# Altium PCB GT502W_MW260.PcbDoc
Units mil, origin at the board's own origin, x right, y up, seen from the top; angles counter-clockwise.
Board outline 2072.48 x 2691 mil, 2 copper layers (Top Layer, Bottom Layer), stack 10.556 mil thick; 114 components, 92 nets, 416 pads, 386 vias.
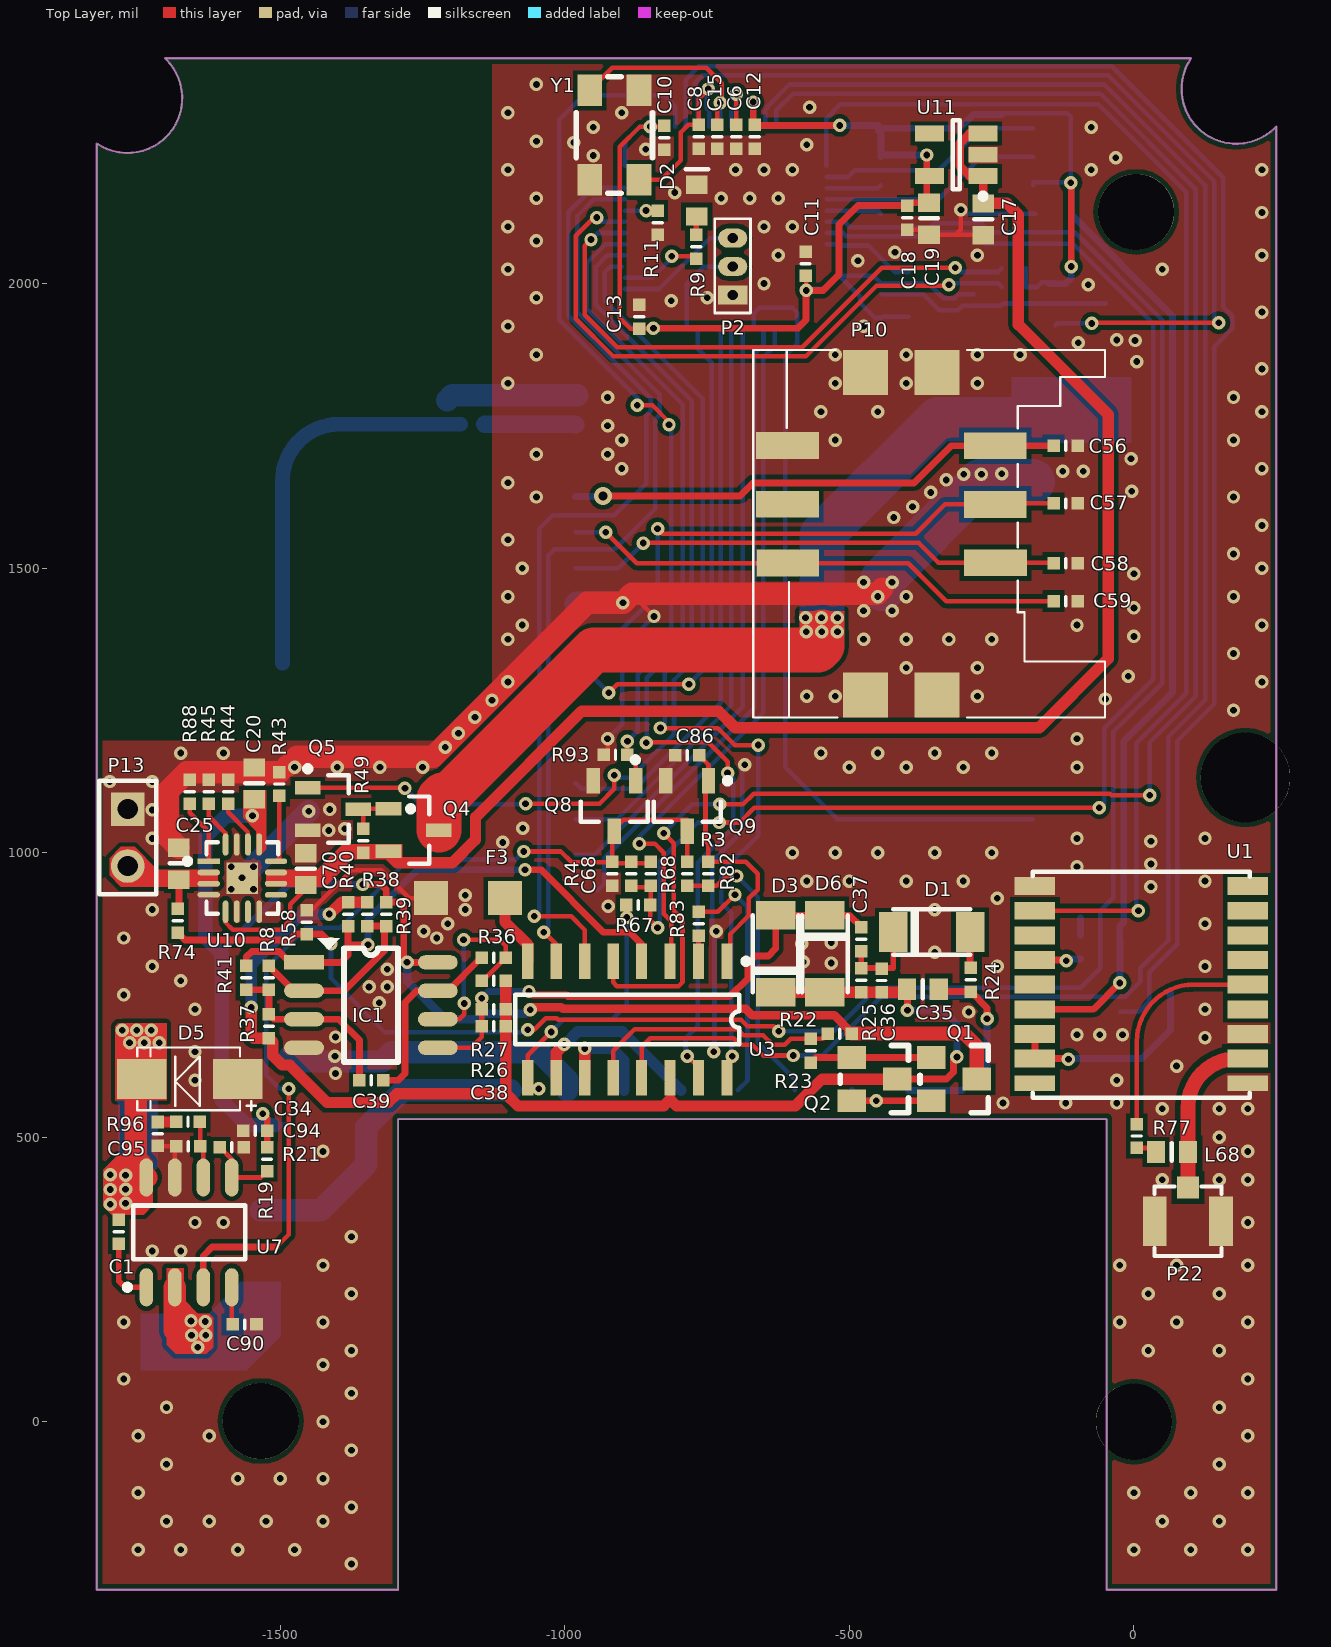
[diagram p0: Top Layer view]
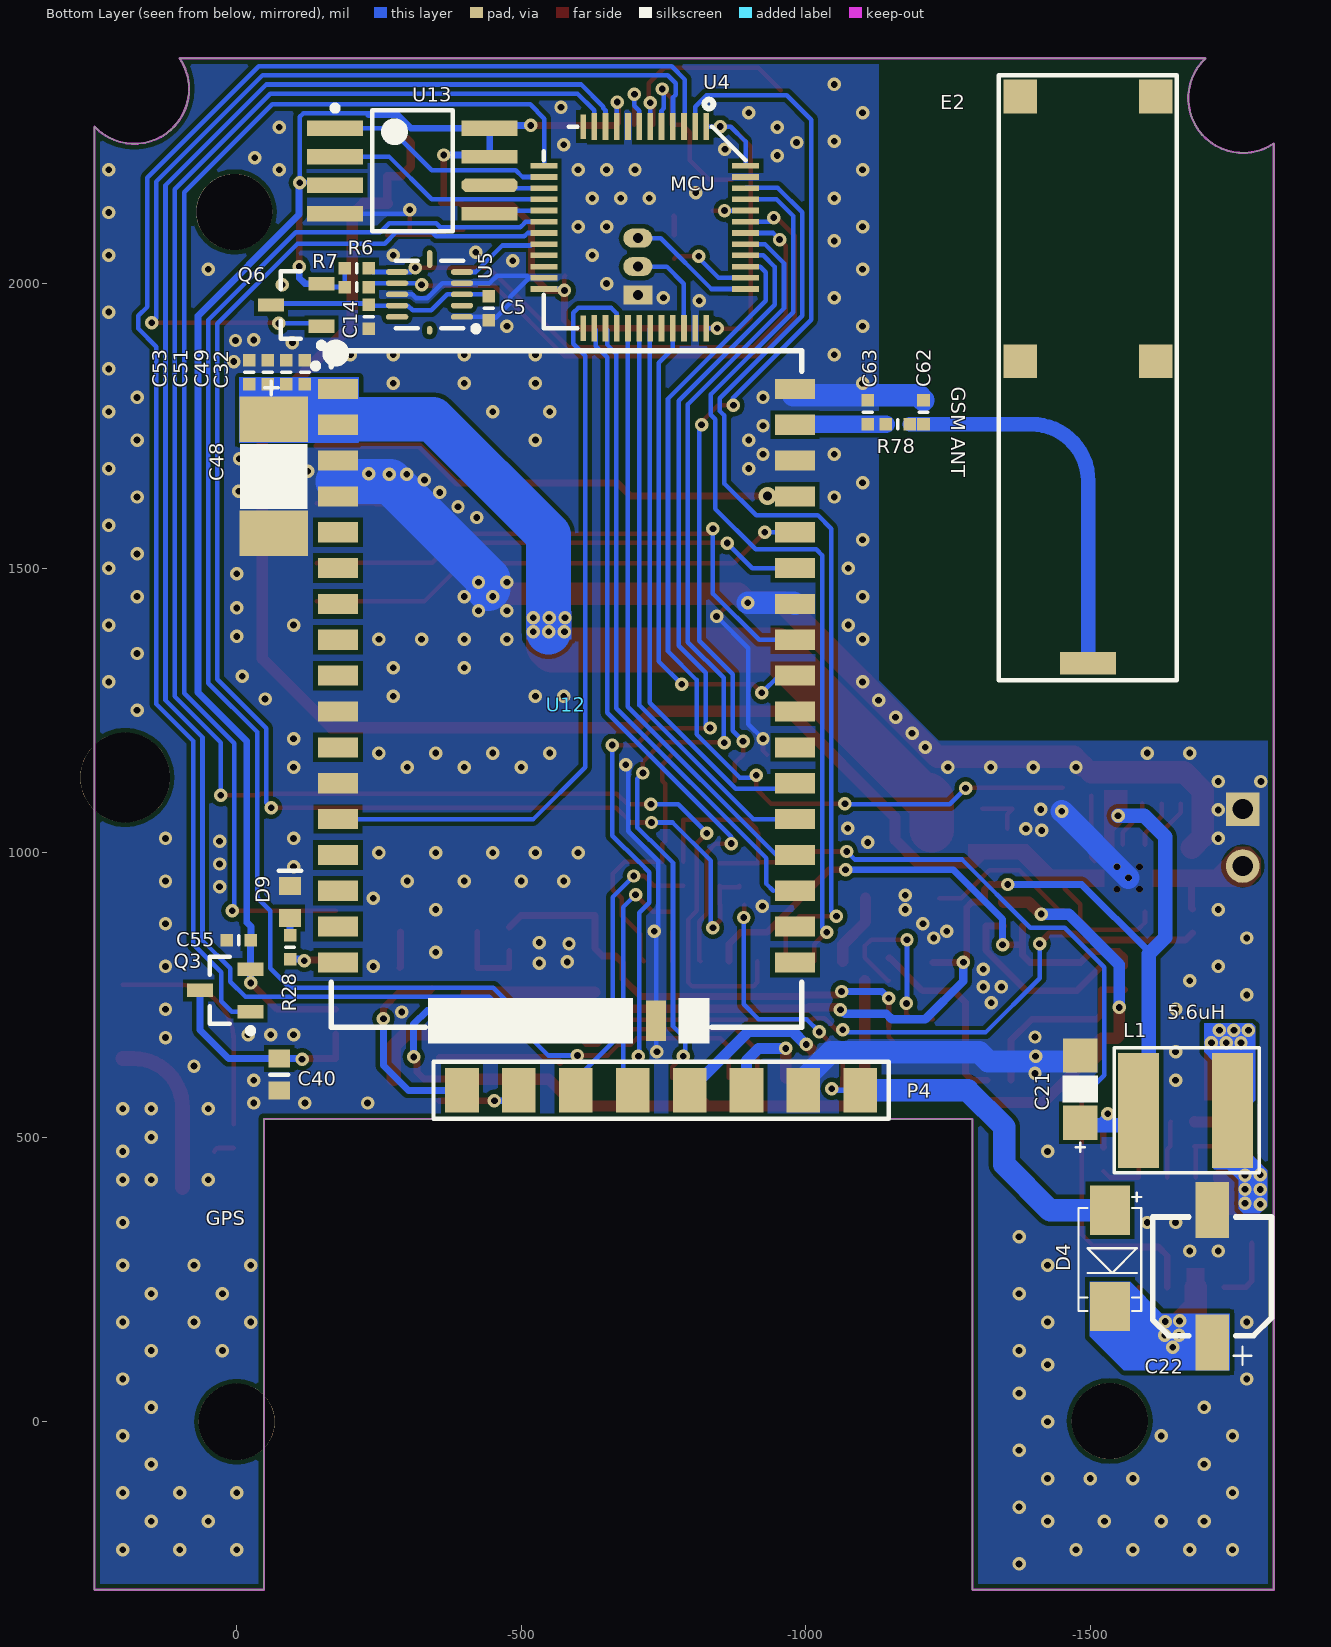
[diagram p1: Bottom Layer view, seen from below]
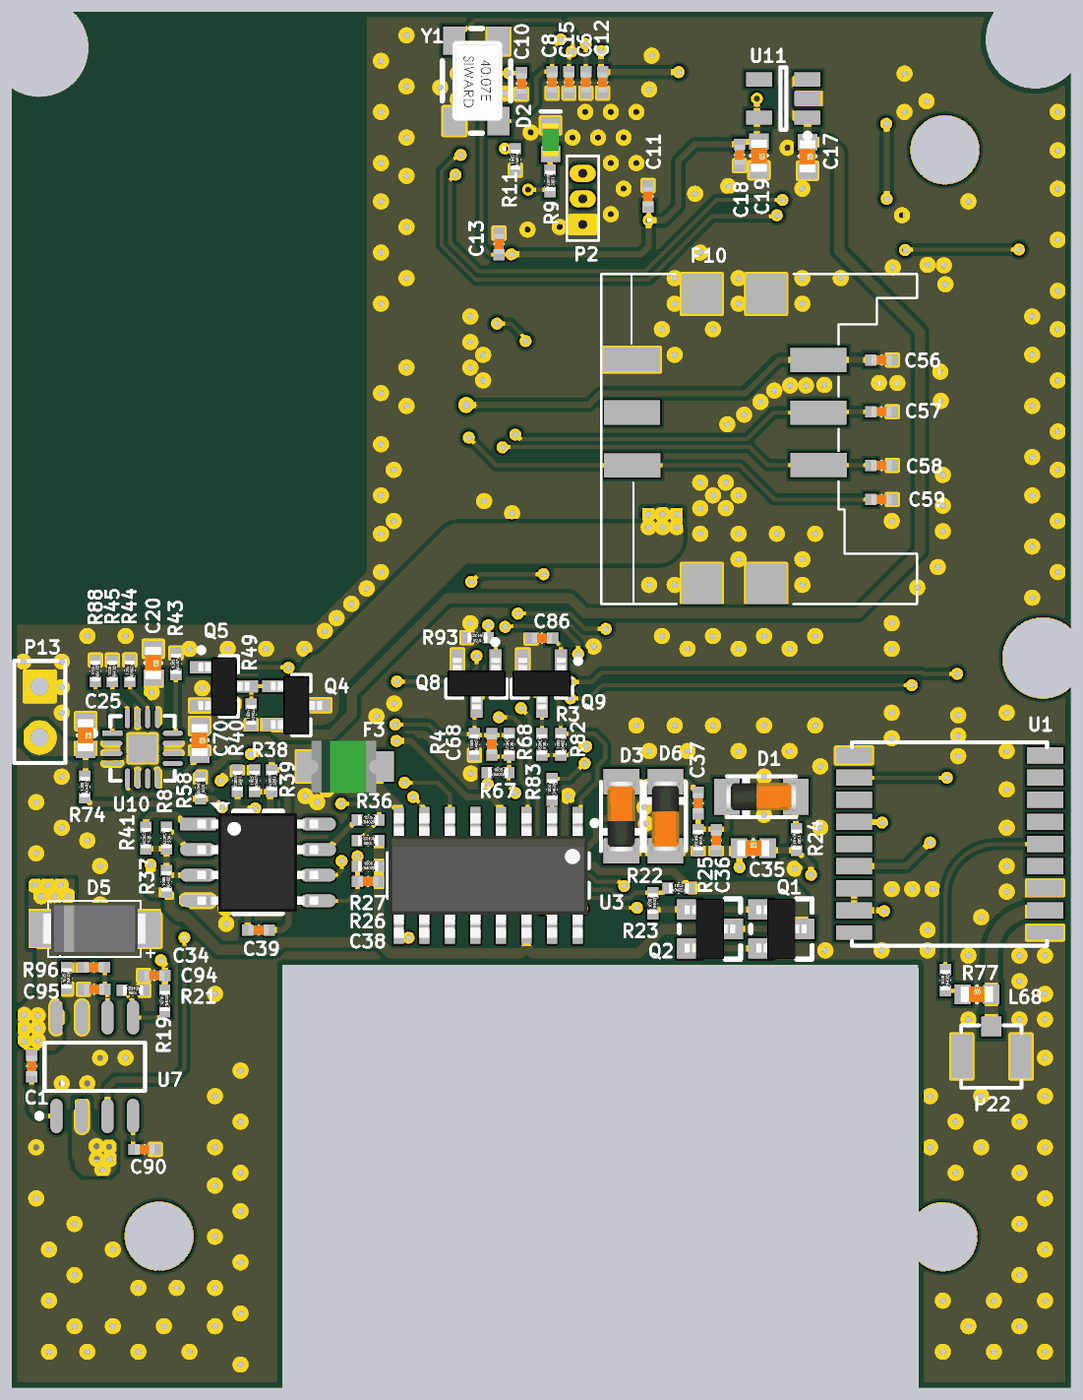
[diagram p2: 3D render of the assembled board from above, using the file's embedded part models]
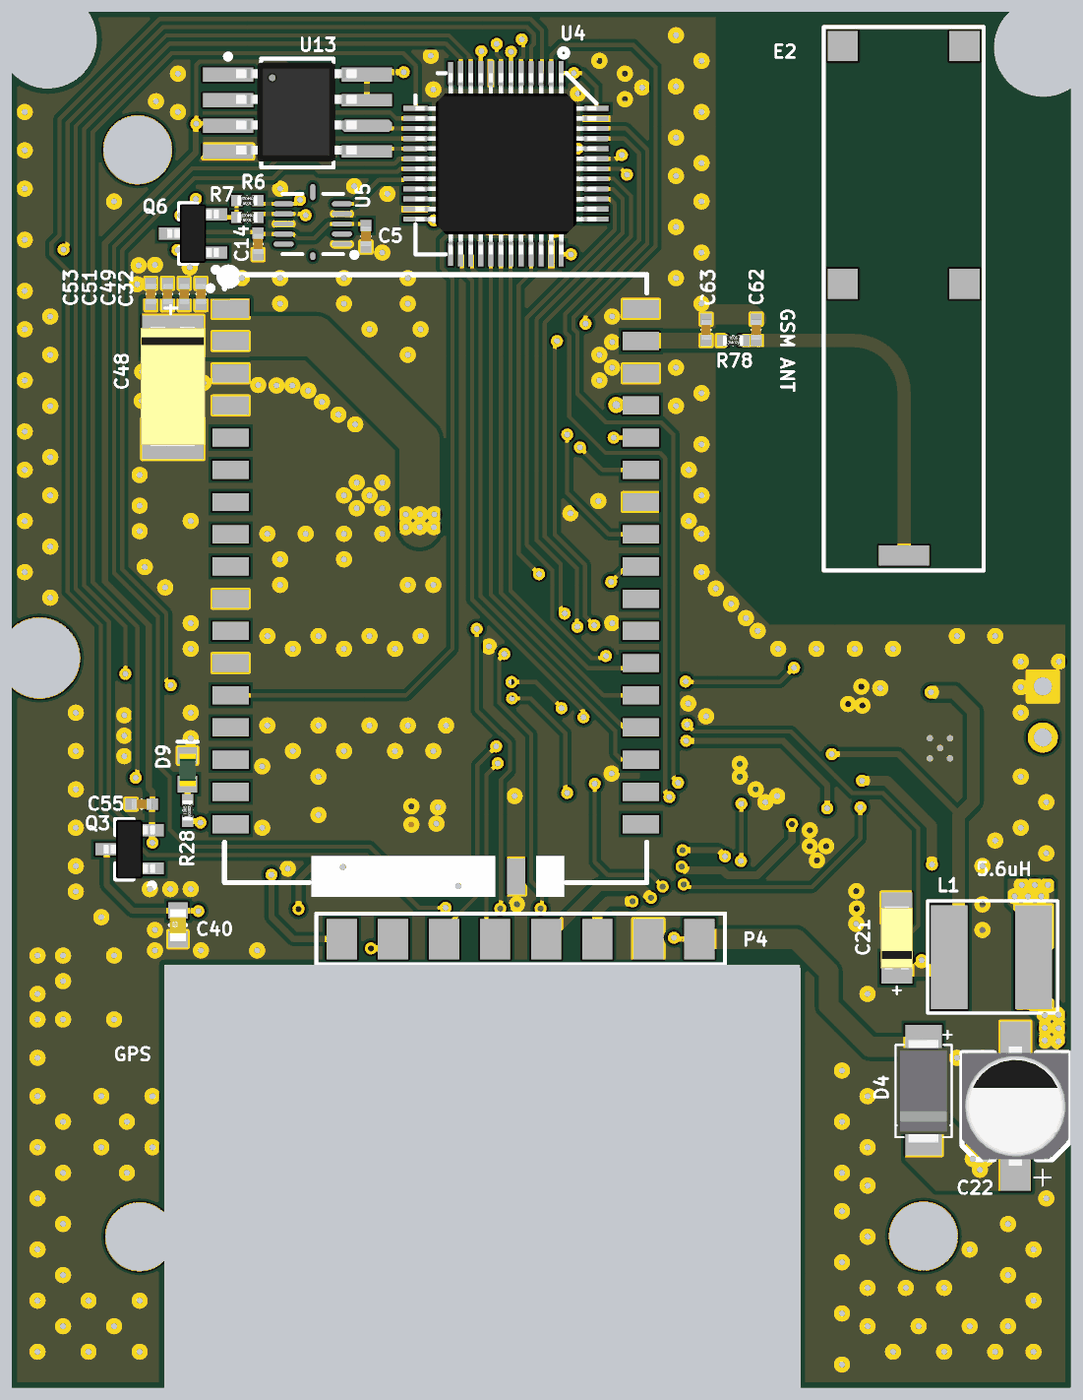
[diagram p3: 3D render of the assembled board from below, using the file's embedded part models]

## Layer stack, top to bottom
Top Layer: signal copper 1.378
Dielectric: core 7.8, FR-4, Dk 4.2
Bottom Layer: signal copper 1.378

## Board outline
-1822.48,-295.16 -1822.48,2246 -1822.4,2246 ccw(c-1768.63,2325.82) -1702.36,2395.62 -1702.36,2395.84 100.12,2395.84 100.12,2395.76 ccw(c179.94,2341.98) 249.74,2275.72 250,2275.48 250,-295.16 -48,-295.16 -48,531.84 -1293,531.84 -1293,-295.16

## Design rules (kind name [scope] priority, off if disabled: settings)
Clearance "Schematic Clearance Constraint" [InNet('NetL68_2')] p1: gap=10
Clearance [All] p2: gap=8
ComponentClearance [All] p1: gap=0 collisioncheckmode=3 verticalgap=0 showdistances=FALSE
HoleSize [All] p1: absolutevalues=TRUE maxlimit=196.85 minlimit=1 maxpercent=80.000 minpercent=20.000
HoleToHoleClearance [All] p1: gap=8 allowstackedmicrovias=TRUE
MinimumSolderMaskSliver [All] p1: minsoldermaskwidth=0.1
PolygonConnect pol_conn_style [All vs IsNamedPolygon('Bottom Layer-GND') Or  IsNamedPolygon('Top Layer-GND')] p1: connectstyle=Direct reliefconductorwidth=10 reliefentries=4 polygonreliefangle="90 Angle" airgapwidth=10
PolygonConnect Pol_Style [All vs IsNamedPolygon('L1_GND') Or  IsNamedPolygon('L3_GND') Or  IsNamedPolygon('L4_GND') Or  IsNamedPolygon('L2_GND')] p2: connectstyle=Direct reliefconductorwidth=10 reliefentries=4 polygonreliefangle="90 Angle" airgapwidth=10 // V3
PolygonConnect L1-GND-GPS_1 [All vs IsNamedPolygon('L1-GND-GPS')] p3: connectstyle=Direct reliefconductorwidth=10 reliefentries=4 polygonreliefangle="90 Angle" airgapwidth=10
PolygonConnect L1-L4-GND-POLYGON-STYLE [All vs IsNamedPolygon('L2-GND-PCB') Or  IsNamedPolygon('L4-GND-PCB') Or  IsNamedPolygon('L1-GND-PCB') Or  IsNamedPolygon('L3-GND-PCB')] p4: connectstyle=Direct reliefconductorwidth=10 reliefentries=4 polygonreliefangle="90 Angle" airgapwidth=10
PolygonConnect GPS-PAD-L1 [All vs IsNamedPolygon('L1-GPS-PAD')] p5: connectstyle=Direct reliefconductorwidth=10 reliefentries=4 polygonreliefangle="90 Angle" airgapwidth=10
PolygonConnect "GPS PAD" [All vs IsNamedPolygon('L4-GPS-PAD')] p6: connectstyle=Direct reliefconductorwidth=10 reliefentries=4 polygonreliefangle="90 Angle" airgapwidth=10
PolygonConnect [All vs isvia] p7: connectstyle=Direct reliefconductorwidth=10 reliefentries=4 polygonreliefangle="90 Angle" airgapwidth=10
RoutingVias ThruVia [All] p1: holewidth=11.81 width=23.62 viastyle="Through Hole" minholewidth=11.81 minwidth=23.62 maxholewidth=39.37 maxwidth=78.74
SilkToSilkClearance [All] p1: silktosilkclearance=0
SilkToSolderMaskClearance SilkscreenOverComponentPads [IsPad] p1: minsilkscreentomaskgap=0 clearancetoexposedcopper=TRUE
SolderMaskExpansion SolderMaskExpansion_1 [IsVia] p1: expansion=-11.81
SolderMaskExpansion [All] p2: expansion=4
Width "Schematic Width Constraint" [InNet('NetL68_2')] p1: maxlimit=26 minlimit=26 preferedwidth=26
Width [All] p2: maxlimit=78.74 minlimit=8 preferedwidth=12
22 further rules are at their usual default settings.

## Classes and differential pairs
component class GSM/GPS: C32 C40 C41 C48 C49 C51 C53 C55 C56 C57 C58 C59 C62 C63 D9 E2 L68 L69 P10 P22 Q3 R28 R77 R78 U1 U12 U33
component class Main: Buzzer1 C5 C6 C8 C10 C11 C12 C13 C14 C15 C35 C36 C37 C38 C39 C68 C86 D1 D2 D3 D6 F3 IC1 P2 P4 Q1 Q2 Q6 Q8 Q9 R3 R4 R6 R7 R8 R9 R11 R22 R23 R24 R25 R26 R27 R36 R37 R38 R39 R40 R41 R67 R68 R82 R83 R93 U3 U4 U5 U13 Y1
component class "Power Supply": C1 C17 C18 C19 C20 C21 C22 C25 C34 C70 C90 C94 C95 D4 D5 L1 P13 Q4 Q5 R19 R21 R43 R44 R45 R49 R58 R74 R88 R96 U7 U10 U11

## Components (designator, comment, footprint, x,y, rotation, side; value= is the part's Value field where it differs from the comment)
C1 "100nF" C0402 -1784,334 r270 top
C5 "100nF-16V-20%" C0402 -443,1957 r90 bottom
C6 "100nF-16V-20%" C0402 -699,2258 r270 top
C8 "15p-50V-5%" C0402 -765,2258 r90 top
C10 "100nF-16V-20%" C0402 -825,2256 r270 top
C11 "100nF-16V-20%" C0402 -577,2035 r90 top
C12 "100nF-16V-20%" C0402 -666,2258 r270 top
C13 "100nF-16V-20%" C0402 -869,1942 r90 top
C14 "100nF-16V-20%" C0402 -232,1942 r90 bottom
C15 "15p-50V-5%" C0402 -732,2258 r270 top
C17 "1uF-16V-20%" C0603 -265,2141 r270 top
C18 "100nF-16V-20%" C0402 -398,2116 r90 top
C19 "1uF-16V-20%" C0603 -360,2142 r270 top
C20 "1uF-16V-20%" C0603 -1545.76,1149.83 r270 top
C21 "4.7uF" C1206 -1482.4,529.39 r90 bottom
C22 "10uF, 35v" "CAPACITOR SIZE_C(D5.3)" -1714.31,139.37 r90 bottom
C25 "10uF-6V3-20%" C0603 -1678.24,1008.54 r270 top
C32 "15p-50V-5%" C0402 -120,1844 r90 bottom
C34 "1nF-5%" C0402 -1662.2,527.02 r0 top
C35 "0.1uF-50V" C0603 -398.85,760.1 r0 top
C36 "3.3nF-10%" C0402 -443.45,775.32 r270 top
C37 "10nF-10%" C0402 -479.07,848 r90 top
C38 "2.2nF-10%" C0402 -1125,695 r180 top
C39 "100nF-16V-20%" C0402 -1340,600 r0 top
C40 "10uF-6V3-20%" C0603 -75,582 r90 bottom
C48 "100u, ceramic" C1812 -65,1761.6 r270 bottom
C49 "100nF-16V-20%" C0402 -87.33,1844 r90 bottom
C51 "10nF-16V" C0402 -54.67,1844 r270 bottom
C53 "68pF 50V 5%" C0402 -22,1844 r90 bottom
C55 "100nF-16V-20%" C0402 -4,846 r0 bottom
C56 "100nF-16V-20%" C0402 -120,1715 r0 top
C57 "47p-50V-5%" C0402 -120,1613.63 r180 top
C58 "47p-50V-5%" C0402 -120,1508.69 r180 top
C59 "47p-50V-5%" C0402 -120,1442 r180 top
C62 "0.5pF" C0402 -1207,1774 r270 bottom
C63 "0.5pF" C0402 -1109,1774 r270 bottom
C68 "100nF-16V-20%" C0402 -883,963 r270 top
C70 "10uF-6V3-20%" C0603 -1455.12,999.05 r270 top
C86 "100nF-16V-20%" C0402 -785,1171 r0 top
C90 "10nF-10%" C0402 -1562.87,170.83 r180 top
C94 "100nF" C0402 -1543.84,511.02 r0 top
C95 "9pF" C0402 -1661.56,483.86 r0 top
D1 "1N4148" DO-213AA -287.76,860.47 r180 top
D2 "LED GREEN" LED0603-G -768.11,2145.81 r90 top
D3 "1N4148" DO-213AA -629.52,889.78 r270 top
D4 "1N4007" "DO-214AC (SMA)" -1554.33,336.08 r270 bottom
D5 "B340A" "DO-214AC (SMA)" -1609.98,582.68 r180 top
D6 "1N4148" DO-213AA -543.24,754.78 r90 top
D9 "LED GREEN" LED0603-G -93.68,913.16 r90 bottom
E2 "GSM Antena conecter" A10343-GSM850/900/1800/1900/WCDMA -1652.29,1863.89 r90 bottom
F3 "PTS120616V025" PTC1206 -1170,920 r180 top
IC1 "LM358" soic8 -1458.22,807.22 r0 top locked
L1 "SD8350-5R6-R" SD8350-5R6-R -1667.46,546.85 r270 bottom
L68 "47nH" C0603 39,474 r0 top
P2 "Debug" HEADER_1.27mm_3PIN -705,1980 r90 top
P4 "Header 8" HDR1X8 -1095.92,582.28 r0 bottom locked
P10 "SIM CARD HOLDER" "SIM MF01-412-063X" -668.76,1560.43 r180 top locked
P13 "BAT" HDR1X2 -1768.09,1076.47 r270 top
P22 "IPEX" IPEX 95,382 r180 top
Q1 "J3Y" SOT23_123 -356,640 r270 top
Q2 "2TY" SOT23_123 -496,640 r270 top
Q3 "BSS84" SOT23-3 20,758 r0 bottom
Q4 "AO3401A" SOT23-3 -1265.71,1039.6 r0 top
Q5 "BSS138" SOT23-3 -1407.55,1076.55 r0 top
Q6 "BSS84" SOT23-3 -104.71,1962.4 r0 bottom
Q8 "BSS138" SOT23-3 -913,1082 r270 top
Q9 "BSS138" SOT23-3 -785,1082 r270 top
R3 "105k-1%" R0402#1 -785,963 r270 top
R4 "26.1k-1%" R0402#1 -917,963 r90 top
R6 "4k7-5%" R0402#1 -211,2027 r0 bottom
R7 "4k7-5%" R0402#1 -211,1994 r0 bottom
R8 "220k-5%" R0402#1 -1520,780 r270 top
R9 "1k-5%" R0402#1 -769,2065 r270 top
R11 "10k-5%" R0402#1 -837,2107 r90 top
R19 "38.3k-1%" R0402#1 -1523.37,461.28 r90 top
R21 "10k-1%" R0402#1 -1585.28,482.05 r180 top
R22 "1k-5%" R0402#1 -517,682 r0 top
R23 "1k-5%" R0402#1 -568,652 r90 top
R24 "330k-5%" R0402#1 -286.63,776.81 r270 top
R25 "470k-1%" R0402#1 -479.18,775.63 r270 top
R26 "470k-5%" R0402#1 -1125,725 r0 top
R27 "330R-5%" R0402#1 -1125,775 r180 top
R28 "1k-5%" R0402#1 -93.82,833.88 r90 bottom
R36 "220k-5%" R0402#1 -1125,815 r0 top
R37 "2.2M-5%" R0402#1 -1520,695 r90 top
R38 "10k-5%" R0402#1 -1347.5,892 r90 top
R39 "10k-5%" R0402#1 -1314,892 r270 top
R40 "10k-5%" R0402#1 -1381,892 r270 top
R41 "470k-5%" R0402#1 -1560,780 r270 top
R43 "1k1-5%" R0402#1 -1501.58,1120.61 r90 top
R44 "47k-5%" R0402#1 -1591.75,1107.33 r90 top
R45 "3k-5%" R0402#1 -1625.97,1106.83 r90 top
R49 "10k-5%" R0402#1 -1354,1021 r90 top
R58 "100k-5%" R0402#1 -1453.58,877.83 r270 top
R67 "100k-5%" R0402#1 -871,908 r0 top
R68 "10k-1%" R0402#1 -849,963 r270 top
R74 "100k-5%" R0402#1 -1680,880 r90 top
R77 "10R-5%" R0402#1 5,502 r90 top
R78 "0R" R0402#1 -1162,1753 r180 bottom
R82 "10k-5%" R0402#1 -748,963 r90 top
R83 "10k-5%" R0402#1 -765,875 r90 top
R88 "10k-5%" R0402#1 -1659.06,1106.83 r90 top
R93 "100k-5%" R0402#2 -911,1172 r90 top
R96 "64.9k-1%" R0402#1 -1715.35,505.65 r90 top
U1 "L70R" MAX7 13,768 r90 top
U3 "ULN2003A/SO" SO16-150mil -890.09,706.66 r180 top locked
U4 "STM32F103CBT6TR" TQFP-48-P0.5 -717.1,2098.78 r270 bottom locked
U5 "MMA7660FC" MMA7660FC -339,1980.99 r0 bottom
U7 "TPS54232" SOIC127P600-8AL -1660.38,332.68 r90 top
U10 "bq24073" pq24073 -1566.75,955.3 r0 top
U11 "XC6209B332MRN_SOT-25" SOT23-5 -312.26,2226.44 r180 top
U12 "MW260" MW260-MODIFY -166.19,1814.95 r90 bottom locked (schematic designator U1)
U13 "MX25L8005MC-15G_SOP-8L" SO8-200mil -308.83,2198 r180 bottom
Y1 "8.000 MHZ" "SMD CRYSTAL 4 X 2.5" -913,2261 r270 top

## Footprints (in the part's own frame and the unit in brackets; to place one, negate y for a bottom-side part, rotate by r counter-clockwise, add the part's x,y. Pads: shape width x height; smd on the part's side, far side on the other; paste and mask are expansions set on the pad)
A10343-GSM850/900/1800/1900/WCDMA [mm] "http://www.antenova-m2m.com/products/giganova-standard-antennas"
  rect 1x2.5 smd: 1(-13.49,3.96)
  rect 1.5x1.5 smd: 2(11.81,0.95) 3(11.81,7) 4(0,7) 5(0,0.95)
  silkscreen extent -14.24,0 12.76,7.95, body extent -14.25,0 12.76,7.95, height 3.3
C0402 [mil]
  rect 22x22 smd: 1(-21,0) 2(21,0)
  silkscreen extent 0,-8 0,8, body extent -20,-10 20,10, height 20
C0603 [mil]
  rect 32x38 smd: 1(0,0) 2(56,0)
  silkscreen extent 28,-16 28,16, body extent -4,-16 59,16, height 12
C1206 [mil]
  rect 60x60 smd: 1(-3.93,0) 2(114.18,0)
  silkscreen extent -55,-31 79,32, body extent -8,-31 118,31, height 63
C1812 [mil]
  rect 80x120 smd: 1(0,0) 2(200.6,0)
  silkscreen extent -67,-59 158,59, body extent -20,-63 216,63, height 99
"CAPACITOR SIZE_C(D5.3)" [mm]
  rect 2.5x1.5 smd: 1(0,0) 2(5.9,0)
  silkscreen extent -1,-2.65 5.6,2.65, body extent 0,-2.65 5.9,2.65, height 5.4
DO-213AA [mil]
  rect 50x70 smd: 1(0,0) 2(135,0)
  silkscreen extent 0,-40 135,40, body extent -1,-29 137,28, height 56
"DO-214AC (SMA)" [mm]
  rect 2.2x1.8 smd: 1(-0.899,-0.5) 2(3.397,-0.5)
  silkscreen extent -1.7,-1.9 3.6,0.9, body extent -1.3,-1.8 3.9,0.8, height 2.3
HDR1X2 [mm] "Connector; Header; 2 Position"
  rect 1.5x1.5 hole 0.9: 1(0,0)
  round 1.5 hole 0.9: 2(2.54,0)
  silkscreen extent -1.27,-1.27 3.81,1.27
HDR1X8 [mm] "Connector; Header; 8 Position"
  rect 1.5x2 smd: 1(0,0) 2(2.54,0) 3(5.08,0) 4(7.62,0) 5(10.16,0) 6(12.7,0) 7(15.24,0) 8(17.78,0)
  silkscreen extent -1.27,-1.27 19.05,1.27
HEADER_1.27mm_3PIN [mm]
  rect 0.85x1.3 hole 0.45: 1(0,0)
  oval 0.85x1.3 hole 0.45: 2(1.27,0) 3(2.54,0)
  silkscreen extent -0.8,-0.8 3.4,0.8
IPEX [mm]
  rect 1x1 smd: 1(0,-0.75)
  rect 1.05x2.2 smd: 2(-1.475,0.75) 3(1.475,0.75)
  silkscreen extent -1.5,-0.8 1.5,2.3
LED0603-G [mil]
  rect 32x38 smd: 1(-28,0) 2(28,0)
  silkscreen extent 55,-20 55,19, body extent -32,-16 32,16, height 43
MAX7 [mm]
  rect 0.8x1.8 smd: 1(4.4,4.75) 2(3.3,4.75) 3(2.2,4.75) 4(1.1,4.75) 5(0,4.75) 6(-1.1,4.75) 7(-2.2,4.75) 8(-3.3,4.75) 11(-3.3,-4.75) 12(-2.2,-4.75) 13(-1.1,-4.75) 14(0,-4.75) 15(1.1,-4.75) 16(2.2,-4.75) 17(3.3,-4.75) 18(4.4,-4.75)
  rect 0.7x1.8 smd: 9(-4.4,4.75) 10(-4.4,-4.75)
  silkscreen extent -5.05,-4.85 5.05,4.85, body extent -5.05,-4.87 5.07,4.84, height 0.56
MMA7660FC [mm] "QFN, 12-Leads, Body 3,0x3,0mm (max), Pitch 0,50mm, IPC Medium Density"
  oval 1x0.25 smd: 1(-1.45,1) 2(-1.45,0.5) 3(-1.45,0) 4(-1.45,-0.5) 5(-1.45,-1) 6(1.45,-1) 7(1.45,-0.5) 8(1.45,0) 9(1.45,0.5) 10(1.45,1)
  oval 0.25x0.8 smd: 11(0,-1.58)
  oval 0.25x0.381 smd: 12(0,1.6)
  silkscreen extent -2.19,-1.5 1.5,1.66, body extent -1.5,-1.5 1.5,1.5, height 0.9
MW260-MODIFY [mm]
  rect 0.9x1.8 smd: 1(0,-0.3) 2(-1.6,-0.3) 3(-3.2,-0.3) 4(-4.8,-0.3) 5(-6.4,-0.3) 6(-8,-0.3) 7(-9.6,-0.3) 8(-11.2,-0.3) 9(-12.8,-0.3) 10(-14.4,-0.3) 11(-16,-0.3) 12(-17.6,-0.3) 13(-19.2,-0.3) 14(-20.8,-0.3) 15(-22.4,-0.3) 16(-24,-0.3) 17(-25.6,-0.3) 18(-25.6,-20.7) 19(-24,-20.7) 20(-22.4,-20.7) 21(-20.8,-20.7) 22(-19.2,-20.7) 23(-17.6,-20.7) 24(-16,-20.7) 25(-14.4,-20.7) 26(-12.8,-20.7) 27(-11.2,-20.7) 28(-9.6,-20.7) 29(-8,-20.7) 30(-6.4,-20.7) 31(-4.8,-20.7) 32(-3.2,-20.7) 33(-1.6,-20.7) 34(0,-20.7)
  rect 1.8x0.9 smd: 41(-28.2,-14.5)
  silkscreen extent -29.21,-21 1.9,0.83, body extent -28.5,-21 1.7,0, height 2.5
pq24073 [mm]
  rect 1x0.25 smd: 1(-1.5,0.75)
  oval 1x0.25 smd: 2(-1.5,0.25) 3(-1.5,-0.25) 4(-1.5,-0.75) 9(1.5,-0.75) 10(1.5,-0.25) 11(1.5,0.25) 12(1.5,0.75)
  oval 0.25x1 smd: 5(-0.75,-1.5) 6(-0.25,-1.5) 7(0.25,-1.5) 8(0.75,-1.5) 13(0.75,1.5) 14(0.25,1.5) 15(-0.25,1.5) 16(-0.75,1.5)
  rect 1.4x1.4 smd: 17(0,0)
  silkscreen extent -2.57,-1.6 1.6,1.61, body extent -1.58,-1.57 1.58,1.58, height 1
PTC1206 [mil]
  rect 60x60 smd: 1(-65,0) 2(65,0)
  body extent -60,-50 66,51, height 27
R0402#1 [mil]
  rect 22x22 smd: 1(-21,0) 2(21,0)
  silkscreen extent 0,-8 0,8, body extent -20,-10 20,10, height 14
R0402#2 [mil]
  rect 22x22 smd: 1(0,-21) 2(0,21)
  silkscreen extent -8,0 8,0, body extent -10,-20 10,20, height 14
SD8350-5R6-R [mil] "Using in PJ2000V1"
  rect 202.73x72 smd: 1(0,82.6) 2(0,-82.6)
  silkscreen extent -110,-125 109,130
"SIM MF01-412-063X" [mm] "http://www.fcn.com.tw/zh/product/ProductList.aspx?Type=13"
  rect 2.8x1.2 smd: 1(-10.8,-3.93) 2(-10.8,-1.31) 3(-10.806,1.295) 5(-1.52,-3.94) 6(-1.526,-1.315) 7(-1.54,1.31)
  rect 2x2 smd: 8(-8.2,7.2) 9(-5,-7.2) 10(-8.2,-7.2) 11(-5,7.2)
  silkscreen extent -15.7,-8.2 0,8.2, body extent -15.7,-8.2 0,8.2, height 2.9
"SMD CRYSTAL 4 X 2.5" [mm]
  rect 1.4x1.1 smd: 1(-2,-1.1) 2(2,-1.1) 3(2,1.1) 4(-2,1.1)
  silkscreen extent -2.6,-1.7 2.6,1.7, body extent -2,-1.2 2,1.3, height 0.63
SO8-200mil [mm] "8-Pin Plastic Medium Body Small Outline Package 1.27 mm Pitch, IPC Low Density"
  rect 2.5x0.7 smd: 1(-3.45,1.905) 2(-3.45,0.635) 3(-3.45,-0.635) 4(-3.45,-1.905) 8(3.45,1.905)
  rect 2.5x0.6 smd: 5(3.45,-1.905) 7(3.45,0.635)
  oct 2.5x0.6 smd: 6(3.45,-0.635)
  silkscreen extent -3.57,-2.7 1.8,2.93, body extent -3.05,-2.4 2.95,2.5, height 1.7
SO16-150mil [mm] "Small Outline; 16 Leads; Body Width 3.9 mm; Pitch 1.27 mm"
  rect 0.5x1.6 smd: 1(-4.445,-2.6) 2(-3.175,-2.6) 3(-1.905,-2.6) 4(-0.635,-2.6) 5(0.635,-2.6) 6(1.905,-2.6) 7(3.175,-2.6) 8(4.445,-2.6) 9(4.445,2.6) 10(3.175,2.6) 11(1.905,2.6) 12(0.635,2.6) 13(-0.635,2.6) 14(-1.905,2.6) 15(-3.175,2.6) 16(-4.445,2.6)
  silkscreen extent -5.42,-2.72 5,1.1, body extent -4.95,-3.1 4.95,3.1, height 1.7
soic8 [mil]
  rect 70x25 smd: 1(0,0)
  oval 70x25 smd: 2(0,-50) 3(0,-100) 4(0,-150) 5(235,-150) 6(235,-100) 7(235,-50) 8(235,0)
  silkscreen extent 23,-175 165,42, body extent -1,-171 235,21, height 69
SOIC127P600-8AL [mm] "SOIC, 8-Leads, Body 4.9x3.9mm, Pitch 1.27mm, IPC High Density"
  oval 1.7x0.6 smd: 1(-2.45,1.905) 2(-2.45,0.635) 3(-2.45,-0.635) 4(-2.45,-1.905) 5(2.45,-1.905) 6(2.45,-0.635) 7(2.45,0.635) 8(2.45,1.905)
  silkscreen extent -2.57,-2.5 1.2,2.88, body extent -2,-2.5 2,2.5, height 2.72
SOT23-3 [mm] "SOT23, 3-Leads, Body 2.9x1.3mm, Pitch 0.95mm, Lead Span 2.4mm, IPC Medium Density"
  rect 1.15x0.6 smd: 1(-1.125,0.95) 2(-1.125,-0.95) 3(1.125,0)
  silkscreen extent -1.25,-1.5 0.7,1.92, body extent -1.27,-1.46 1.28,1.46, height 0.99
SOT23-5 [mm] "SOT23, 5-Leads, Body 2.9x1.6mm, Pitch 0.95mm, Lead Span 2.8mm, IPC Low Density"
  rect 1.3x0.7 smd: 1(-1.2,0.95) 2(-1.2,0) 3(-1.2,-0.95) 4(1.2,-0.95) 5(1.2,0.95)
  silkscreen extent -1.33,-1.55 0.15,1.97, body extent -0.9,-1.55 0.9,1.55, height 1.45
SOT23_123 [mil]
  rect 40x50 smd: 1(0,0) 2(76,0) 3(38,80)
  silkscreen extent -21,-20 97,100, body extent -21,-9 97,89, height 44
TQFP-48-P0.5 [mm] "Thin QFP, 48-Leads, Body 7x7mm, Pitch 0.5mm, IPC Medium Density"
  rect 1.2x0.254 smd: 1(-4.5,2.75) 2(-4.5,2.25) 3(-4.5,1.75) 4(-4.5,1.25) 5(-4.5,0.75) 6(-4.5,0.25) 7(-4.5,-0.25) 8(-4.5,-0.75) 9(-4.5,-1.25) 10(-4.5,-1.75) 11(-4.5,-2.25) 26(4.5,-2.25) 27(4.5,-1.75) 28(4.5,-1.25) 29(4.5,-0.75) 30(4.5,-0.25) 31(4.5,0.25) 32(4.5,0.75) 33(4.5,1.25) 34(4.5,1.75) 35(4.5,2.25) 36(4.5,2.75)
  rect 1.092x0.254 smd: 12(-4.5,-2.75)
  rect 0.254x1.2 smd: 13(-2.75,-4.5) 14(-2.25,-4.5) 15(-1.75,-4.5) 16(-1.25,-4.5) 17(-0.75,-4.5) 18(-0.25,-4.5) 19(0.25,-4.5) 20(0.75,-4.5) 21(1.25,-4.5) 22(1.75,-4.5) 23(2.25,-4.5) 24(2.75,-4.5) 37(2.75,4.5) 38(2.25,4.5) 39(1.75,4.5) 40(1.25,4.5) 41(0.75,4.5) 42(0.25,4.5) 43(-0.25,4.5) 44(-0.75,4.5) 45(-1.25,4.5) 46(-1.75,4.5) 47(-2.25,4.5) 48(-2.75,4.5)
  rect 1.143x0.254 smd: 25(4.5,-2.75)
  silkscreen extent -5.71,-4.5 4.5,4.5, body extent -4.5,-4.5 4.5,4.5, height 1.5

## Part data
C1 C94: library part Cap, "Capacitor"
C5 C6 C10 C11 C12 C13 C14 C18 C39 C49 C55 C56 C68 C86: library part Cap, "CAP CER 0.1UF 16V Y5V 0402"
C8 C15 C32: library part Cap, "CAP CER 15PF 50V 5% NPO 0402"
C17 C19 C20: library part Cap, "CAP CER 1UF 16V Y5V 0603"
C21: library part Cap2, "Capacitor"
C22: library part "Cap Pol3", "CAP ALUM 10UF 35V 20% SMD"
C25 C40 C70: library part Cap, "CAP CER 10UF 6.3V 20% X5R 0603"
C34: library part 1nF-50V-C0805, "Non-Polarized Capacitor"
C35: library part CN2, "CAP CER 0.1UF 50V Y5V 0603"
C36: library part 1nF-50V-C0805, "CAP CER 3300PF 50V 10% X7R 0402"
C37 C90: library part 10nF-50V-C0805, "Non-Polarized Capacitor"
C38: library part 2.2nF-50V-C0805, "CAP CER 2200PF 50V 10% X7R 0402"
C48: library part "Cap Pol3", "CAP CER 100UF 10V 20% X5R 1812"
C51: library part 10nF-16V-C0402-10%, "CAP CER 10000PF 16V 10% X7R 0402"
C53: library part Cap, "CAP CER 68PF 50V 5% NPO 0402"
C57 C58 C59: library part Cap, "CAP CER 47PF 50V 5% NPO 0402"
C62 C63: library part 0.5pF-50V-C0805, "Non-Polarized Capacitor"
C95: library part 9pF-50V-C0805, "Non-Polarized Capacitor"
D1 D3 D6: "DIODE SMALL SIG 100V 0.2A ALF2"
D2 D9: library part LED2, "LED GREEN CLEAR THIN 0603 SMD"
D4: library part Diode, "DIODE GEN PURPOSE 1000V 1A SMA"
D5: library part "D Schottky", "DIODE SCHOTTKY 40V 3A SMA"
E2: library part "Header 5", "Header, 5-Pin"
F3: library part "Fuse 2", "PTC RESETTABLE SMD 1206 16V .25A"
IC1: "Low-Power Dual Operational Amplifier"
L1: library part Inductor, "Digikey part SD8350-4R7-R"
L68: library part Inductor, "Inductor"
P2: library part "Header 3", "NA"
P4: "Header, 8-Pin"
P10: library part "SIM CARD", "SIM _CONNECTOR_410108105011-2LF"
P13: library part "Header 2", "Header, 2-Pin"
Q1: library part NPN_123, "NPN Bipolar Transistor"
Q2: library part PNP_123, "PNP Bipolar Transistor"
Q3 Q6: library part MOSFET-P, "MOSFET P-CH 50V 130MA SOT23-3"
Q4: library part MOSFET-P, "MOSFET P-CH -30V -4.3A SOT23"
Q5 Q8 Q9: library part MOSFET-P, "MOSFET N-CH 50V 200MA SOT23-3"
R3: library part 105k-1%-R0805, "RES 105k OHM 1/4W 1% 0805 SMD"
R4: library part 26.1k-1%-R0805, "RES 26.1k OHM 1/4W 1% 0805 SMD"
R6 R7: library part Res1, "RES 4.7K OHM 1/16W 5% 0402 SMD"
R8 R36: library part 220k-5%-R0805, "RES 220k OHM 1/8W 5% 0805 SMD"
R9 R28: library part Res1, "RES 1.0K OHM 1/16W 5% 0402 SMD"
R11 R49 R82 R83 R88: library part Res1, "RES 10K OHM 1/16W 5% 0402 SMD"
R19: library part 38.3k-1%-R0805, "RES 38.3k OHM 1/4W 1% 0805 SMD"
R21: library part 10k-1%-R0805, "RES 10k OHM 1/4W 1% 0805 SMD"
R22 R23: library part 1k-5%-R0805, "RES 1k OHM 1/8W 5% 0805 SMD"
R24: library part 330k-5%-R0805, "RES 330k OHM 1/8W 5% 0805 SMD"
R25: library part 470k-1%-R0805, "RES 470k OHM 1/4W 1% 0805 SMD"
R26 R41: library part 470k-5%-R0805, "RES 470k OHM 1/8W 5% 0805 SMD"
R27: library part 330R-5%-R0805, "RES 330 OHM 1/8W 5% 0805 SMD"
R37: library part 2.2M-5%-R0805, "RES 2.2M OHM 1/8W 5% 0805 SMD"
R38 R39 R40: library part 10k-5%-R0805, "RES 10k OHM 1/8W 5% 0805 SMD"
R43: library part Res1, "RES 1.1K OHM 1/16W 5% 0402 SMD"
R44: library part Res1, "RES 47K OHM 1/16W 5% 0402 SMD"
R45: library part Res1, "RES 1.5K OHM 1/16W 5% 0402 SMD"
R58 R67 R74 R93: library part Res1, "RES 100K OHM 1/16W 5% 0402 SMD"
R68: library part Res1, "RES 10.0K OHM 1/16W 1% 0402 SMD"
R77: library part 10R-5%-R0402, "RES 10 OHM 1/16W 5% 0402 SMD"
R78: library part 0R-0805
R96: library part 64.9k-1%-R0805, "RES 64.9k OHM 1/4W 1% 0805 SMD"
U1: library part MAX-7
U3: library part ULN2003A/SO_0, "IC DARL TRANS ARRAY 16-SOIC"
U4: library part ATmega128_4, "MCU ARM 128K FLASH/TIMER"
U5: "ACCELEROMETER 3X3 DGTL 10-DFN"
U7: library part Component_1
U10: library part BATTERY_CHARGER, "IC LI-ION CHARGE/PWR MGMT 16-QFN"
U12: library part GSM_MW260, "THINK WILL GSM MODULE"
U13: library part FlashIC
Y1: library part CRYSTAL-SMT, "CRYSTAL 8.000 MHZ 18PF SMD"

## Free pads (board coordinates)
  round 133.86 hole 133.86: 0(3.94,2125.98) 1(0,0) 2(-1534.39,1.18)
  round 157.48 hole 157.48: 0(195.94,1131.98)

## Via types
v1: diameter 23.62, hole 11.81, Top Layer to Bottom Layer, 380 vias
v2: diameter 11.81, hole 11.81, Top Layer to Bottom Layer, tented top, 5 vias
v3: diameter 31.5, hole 15.75, Top Layer to Bottom Layer, 1 vias

## Nets (pads, with @x,y where several pads share a name; then routed paths per layer and width w, separated by ;. In a path a pad name is that pad's centre, name@x,y a point inside that pad or via, vN(x,y) a via of type N, cw(c..) or ccw(c..) an arc to the next point about the centre after c; other vN are vias at no path point)
3V3: C10.1 C11.1 C12.1 C13.1 C18.2 C19.1 C55.1 Q3.2 Q6.2 R6.2 R7.2 U1.6 U4.1 U4.9 U4.24 U4.36 U4.48 U11.5 U13.3 U13.7 U13.8 | length 4361.3
  Top Layer w8: v1(-844.38,1921.62) -845,1921 C13.1 -885,1921 -903.35,1939.35 -903.35,2240.65 -868,2276 v1(-850,2276) -828,2276 C10.1@-825,2279 ; C11.1 -576,2013 v1(-576,1988)
  Top Layer w12: v1(-844.38,1921.62) -590.38,1921.62 -576,1936 v1(-576,1988) -546,1988 -518,2016 -518,2104 -485,2137 C18.2 -393,2142 C19.1 -364,2146 v1(-364,2226) ; v1(-669,2319) -669,2282 C12.1 -665,2278 v1(-517,2278) ; U1.6 -71.31,724.69 v1(-25,771) ; v1(-111,2177) -110,2176 v1(-110,2030)
  Bottom Layer w8: U4.48 -894.26,2249.74 -868.05,2275.95 U4.1 ; v1(-844.38,1921.62) U4.36 ; v1(-669,2319) -667.88,2317.88 U4.9 ; v1(-576,1988) -573.48,1990.52 U4.24 ; U13.8@-448.78,2269 U13.8@-448.78,2273.31 ; -231.79,2299 -117,2299 -111,2293 v1@-111,2178 ; R6.2 R7.2 -170,1994 -162,2002 Q6.2@-138,2002 ; U13.3@-177.17,2178 v1@-111,2178 ; v1(-111,2177) v1@-111,2178
  Bottom Layer w12: v1(-517,2278) U13.8@-448.83,2278 ; U13.8@-448.78,2269 -444.65,2264.87 U13.7 -441.65,2226 v1(-364,2226) ; U13.8 -306,2273 -282,2297 -231.79,2297 ; Q6.2 -120.2,1999.8 -110,2010 v1(-110,2030) ; v1(-111,2177) -109.79,2175.79 -109.79,2121.24 68,1943.46 68,1281.57 -17.89,1195.68 -17.89,877.11 -25,870 C55.1 -24.29,845.29 Q3.2 v1@-24.29,771
4V4: C17.1 C70.2 Q4.2 R49.1 U10.5 U10.10 U10.11 U11.1 U11.3 | length 2790.8
  Top Layer w8: U10.5 -1596.27,877.23 -1583.6,864.56 -1499.44,864.56 -1482.39,881.61 -1482.39,909 -1455.12,936.27 C70.2
  Top Layer w15: C17.1 U11.1 -288.9,2189.04 -306.11,2206.24 -306.11,2246.64 -288.9,2263.84 U11.3
  Top Layer w20: Q4.2 -1310,997 -1295,982 -1197.88,982 -1157,1022.88 -1157,1062 -970.19,1248.81 -729.81,1248.81 -700.59,1219.59 -166.41,1219.59 -45,1341 -45,1770 -203,1928 -203,2121 -223,2141 C17.1
5V: C20.2 C21.1 C94.2 IC1.8 L1.2 Q1.3 R19.2 R22.2 R39.1 U10.13 | length 2512.1
  Top Layer w12: v1(-1531,541) -1522.84,532.84 C94.2 -1522.84,482.81 R19.2 ; v1(-1355,944) -1323,944 -1314,935 R39.1 -1292,913 -1283,904 -1283,813 v1(-1277.22,807.22) IC1.8
  Top Layer w15: v1(-1061,724) -1056.69,728.31 -1006.06,728.31 -1003.25,725.5 -682.16,725.5 -670.94,714.28 -526.36,714.28 -496,683.92 R22.2
  Top Layer w25: R22.2 -298,682 -276,660 Q1.3
  Bottom Layer w12: -1603,822 -1603,826.05 -1485.05,944 v1(-1355,944) ; v1(-1531,541) -1510.86,520.86 C21.1@-1487,520.86
  Bottom Layer w15: v1(-1277.22,807.22) -1277.22,774.22 -1210.22,707.22 -1151.28,707.22 -1141.81,716.69 -1068.31,716.69 v1(-1061,724)
  Bottom Layer w25: v1(-1549,1065) -1595,1065 -1632,1028 -1632,851 -1603,822 -1603,564.99 L1.2 -1558.88,520.86 C21.1@-1510.86,520.86
*DIN1: P4.6 R3.2 R82.1 | length 513
  Top Layer w8: R3.2 R82.1 -733,942 -716,959 v1(-698,959)
  Bottom Layer w8: v1(-698,959) -661,922 -661,667 -595.92,601.92 P4.6
*DIN2: P4.5 R83.2 | length 436.3
  Top Layer w8: R83.2 -731,896 v1(-701,926)
  Bottom Layer w8: v1(-701,926) -679,904 -679,599.21 P4.5
*DOUT1: P4.4 U3.10 | length 321.8
  Top Layer w19.68: U3.10 -1015.09,648.91 v1(-1001,663)
  Bottom Layer w19.68: v1(-1001,663) -999.94,663 -977.28,685.65 -899.29,685.65 P4.4
*DOUT2: P4.3 U3.11 | length 182.2
  Top Layer w19.68: U3.11 -965,604.39 v1(-965,656)
  Bottom Layer w19.68: v1(-965,656) -917,656 -895.92,634.92 P4.3
*RFID_CLK: R22.1 R23.2 U3.12 | length 460.3
  Top Layer w8: U3.12 -915.09,652 -877.09,690 -696.87,690 -685.64,678.78 -651.15,678.78 -634.56,662.19 -613.81,662.19 -603,673 R23.2 -547,673 R22.1
*RFID_DEMOD: IC1.1 R40.2 R41.1 U3.4 | length 945.8
  Top Layer w12: R41.1 -1560,816.56 -1550,826.56 -1549.44,826 -1502,826 -1483.22,807.22 IC1.1 -1393.78,807.22 -1381,820 -1381,841 ; R40.2 -1381,841 ; v1(-1346,838) -1378,838 -1381,841 ; v1(-1070,970) -1042,970 -932,860 -885.5,860 -865.09,839.6 U3.4
  Bottom Layer w12: v1(-1346,838) -1346,883 -1259,970 v1(-1070,970)
*RFID_GND: U3.3 U4.26 | length 1252.1
  Top Layer w8: v1(-869,1016) -842.03,1016 -826,999.97 -826,892.37 -813,879.37 -813,811.12 U3.3
  Bottom Layer w8: v1(-869,1016) -869,1028 -651,1246 -651,1870.28 -631.2,1890.08 -631.2,1918.93 U4.26
ACCEL_EN: Q6.1 U4.4 | length 1617.7
  Top Layer w8: v1(-74,1930) -73,1931 v1(149,1931)
  Bottom Layer w8: U4.4 -766.81,2276.45 -766.81,2327.14 -771.81,2332.14 -771.81,2351.86 -757.8,2365.87 -45.5,2365.87 141,2179.37 141,1939 v1(149,1931) ; Q6.1@-138,1927.2 -135.2,1930 v1(-74,1930) v1@-76.4,1927.6
ACCEL_VCC: C5.2 C14.2 Q6.3 U5.3 U5.9 | length 410.6
  Bottom Layer w8: C5.2@-443,1982 -441.99,1980.99 U5.3 -369.99,1980.99 -342,1953 -309.23,1953 -300.92,1961.31 U5.9 -233.69,1961.31 C14.2 -230,1965 Q6.3@-49.42,1965
ACCL_INT: U4.20 U5.5 | length 164.1
  Bottom Layer w8: U4.20 -518.74,2069.26 -516.49,2067 -467,2067 -420.36,2020.36 U5.5
AMP1: C37.2 C38.2 D3.1 D6.2 IC1.5 R26.1 | length 946.3
  Top Layer w8: IC1.5 -1164.78,657.22 -1146,676 C38.2
  Top Layer w10: C38.2 R26.1 v1(-1146,744)
  Top Layer w12: v1(-1063,756) -1056.81,749.81 -997.15,749.81 -994.34,747 -710.52,747 -678.52,779 -678.52,805.97 -666,818.48 -642.52,818.48 -629.52,831.48 D3.1 D6.2 -499.84,889.78 C37.2
  Bottom Layer w12: v1(-1146,744) -1134,756 v1(-1063,756)
AMP2: C39.2 IC1.7 R36.1 | length 335.3
  Top Layer w12: C39.2 -1293,600 -1281,612 -1281,737 -1260.78,757.22 IC1.7 -1205.57,757.22 -1147.8,815 R36.1
ATN: C63.2 R78.1 U12.33 | length 160.3
  Bottom Layer w31: R78.1 C63.2 -982.19,1753 U12.33
CC_UART_RX: U4.21
CC_UART_TX: U4.22
DIN1: U3.16 U4.40 | length 1723.3
  Top Layer w8: v1(-832,1219) -731.11,1219 -701.11,1189 v1(-660,1189)
  Bottom Layer w8: U4.40 -925.58,2049.57 -945.88,2029.26 -945.88,1963.14 -777,1794.25 -777,1363.3 -824.19,1316.11 v1@-824.19,1222 ; v1(-706,642) -707.34,643.34 -707.34,894.34 -724.81,911.81 -724.81,965.86 -707.86,982.81 -707.19,982.81 -660,1030 v1(-660,1189)
DIN2: U3.15 U4.41 | length 1787.9
  Top Layer w8: v1(-857,1193) -856,1194 -748.03,1194 -714,1159.97 v1(-714,1140) ; v1@-788,646 -765.09,623.09 U3.15
  Bottom Layer w8: U4.41 -928.52,2069.26 -961.88,2035.89 -961.88,1956.51 -793,1787.63 -793,1369.93 -855.81,1307.12 -855.81,1194.19 v1(-857,1193) ; v1(-785,642) -788,645 -788,674 -766.77,695.23 -766.77,982.23 -726,1023 -725.33,1023 -704.19,1044.14 -704.19,1130.19 v1(-714,1140)
FL_CS: U4.14 U13.1 | length 398.4
  Bottom Layer w8: U4.14 -502.38,2187.37 -490.55,2199.19 -343.05,2199.19 -268.93,2273.31 U13.1@-177.13,2273.31
GND: C5.1 C6.2 C8.1 C10.2 C11.2 C12.2 C13.2 C14.1 C15.2 C17.2 C18.1 C19.2 C20.1 C21.2 C22.2 C25.1 C32.2 C40.1 C48.2 C49.2 C51.1 C53.2 C55.2 C56.2 C57.1 C58.1 C59.1 C62.1 C63.1 C70.1 C86.1 C90.1 C94.1 C95.1 D2.2 D5.1 D9.2 F3.2 IC1.4 P2.1 P4.2 P10.5 P10.8 P10.9 P10.10 P10.11 P13.1 P22.2 P22.3 Q5.2 Q8.2 Q9.2 R4.1 R11.1 R21.1 R43.2 R44.2 R45.2 R58.1 R88.2 R93.2 R96.1 U1.1 U1.10 U1.12 U4.8 U4.23 U4.35 U4.47 U5.1 U5.4 U5.8 U7.7 U10.4 U10.6 U10.8 U10.15 U10.17 U11.2 U12.3 U12.4 U12.10 U12.12 U12.28 U12.32 U12.34 U12.41 U13.4 Y1.2 Y1.4 | length 4841.1
  Top Layer w8: R96.1 ccw(c-1714.56,484.65) -1714.56,483.86 C95.1 ccw(c-1682.56,481.04) -1685.38,481.04 U7.7 ; R58.1 -1445.2,898.83 -1375.03,969 -1322.54,969 -1273.54,920 F3.2 ; R93.2 -925,1179 v1(-925,1200) ; v1(-898,1439) -867.16,1439 v1(-843.34,1415.18) ; v1@-740,648.75 v1(-738.56,650.19) ; C18.1 -369,2095 C19.2 -313,2086 ; v1(-304,2130) -304,2095 -313,2086 ; C17.2 -266,2086 -313,2086
  Top Layer w39.37: C25.1 -1697.74,1028.04 -1697.74,1108.3 -1664.43,1141.61 R43.2 ; -1486.69,1152.69 -1470.98,1168.41 -1231.59,1168.41 v1(-1100,1300) -961,1439 v1(-898,1439) -881.94,1455.06 -451.2,1455.06 -442,1464.26
  Bottom Layer w8: v1(-925,1200) -899.19,1225.81 -899.19,1359.33 v1(-843.34,1415.18) ; v1(-738.56,650.19) -737.06,651.69 U12.41 -737.06,858.94 v1(-734,862) -740.81,868.81 -740.81,984.89 -688.19,1037.51 -688.19,1150.15 v1(-683.81,1154.53) ; U5.1 -441.38,1941.62 -443,1940 -455,1940 -481,1966 -481,1977.18 -514.02,2010.2 -510.22,2014 -458,2014 -445,2001 -396.41,2001 U5.4 -361.35,2000.68 -334.86,1974.19 -315.14,1974.19 -308.33,1980.99 U5.8 ; v1@-298,2123 U13.4
  Bottom Layer w12: U12.4 -178,1652
  Bottom Layer w39.37: v2@-1567.17,955.72 v1(-1450,1072.89) ; C21.2 -1471.83,633 -1404,633 -1321,633 -1304.66,649.34 -1044.34,649.34 -995.92,600.92 P4.2 ; C62.1 -1198,1804 U12.34@-978,1804 ; U12.28 -979.15,1439 v1(-898,1439)
  Bottom Layer w78.74: -442,1464.26 -442,1480 -270,1652 -178,1652
  other v1: -1375,-250 -1750,-225 -1675,-225 -1575,-225 -1475,-225 0,-225 100,-225 200,-225 -1700,-175 -1625,-175 -1525,-175 -1425,-175 50,-175 150,-175 -1375,-150 -1750,-125 0,-125 100,-125 200,-125 -1575,-100 -1500,-100 -1425,-100 -1700,-75 150,-75 -1375,-50 -1750,-25 -1625,-25 200,-25 -1425,0 -1700,25 150,25 -1375,50 -1775,75 200,75 -1425,100 -1375,125 25,125 150,125 -1775,175 -1425,175 -25,175 75,175 200,175 -1375,225 25,225 150,225 -1425,275 -25,275 75,275 200,275 -1725,300 -1675,300 -1375,325 -1650,350 -1600,350 200,350 50,425 150,425 200,425 -1425,475 200,475 150,500 50,550 150,550 200,550 -230,560 -120,560 -30,560 -1650,600 -30,600 -1403,612 75,625 -1404,642 -1650,650 125,675 -1403,676 -100,680 -60,680 -20,680 -290,720 -1650,725 125,725 -1326,736 -1775,750 -1344,764 -1312,764 -1675,775 -1312,795 -1725,800 -240,800 125,800 -532,806 -581,808 -350,825 -584,840 -532,842 -1775,850 -1225,850 -1248,862 -1206,875 125,875 -1725,900 -1175,900 -350,900 -924,906 -240,920 -1175,925 30,940 -575,950 -500,950 -400,950 -300,950 125,950 -100,975 30,980 -600,1000 -525,1000 -450,1000 -350,1000 -250,1000 -1109,1018 30,1020 -1725,1025 -100,1025 125,1025 -1415,1039 -1387,1042 -1074,1043 -1725,1075 -1413,1076 -1800,1125 -1725,1125 -1475,1150 -1400,1150 -1325,1150 -1250,1150 -500,1150 -400,1150 -300,1150 -100,1150 -1675,1175 -1600,1175 -550,1175 -450,1175 -350,1175 -250,1175 -1210,1185 -100,1200 -1187,1210 -1158,1238 175,1250 -1128,1268 -50,1270 -575,1275 -525,1275 -275,1275 225,1300 -10,1310 -400,1325 -275,1325 175,1350 -1100,1375 -475,1375 -400,1375 -325,1375 -250,1375 0,1380 -1075,1400 -100,1400 225,1400 -475,1425 -425,1425 0,1430 -1100,1450 -450,1450 -400,1450 175,1450 -475,1475 -425,1475 0,1490 -1075,1500 225,1500 175,1525 -1100,1550 225,1575 -422,1589 -389,1608 -1050,1625 175,1625 -357,1633 -4,1635 -1100,1650 -330,1655 -299,1665 -268,1665 -232,1666 -125,1670 -89,1670 -900,1675 225,1675 -5,1692 -1050,1700 -925,1700 -900,1725 -525,1725 175,1725 -925,1750 -550,1775 -450,1775 225,1775 -925,1800 175,1800 -1100,1825 -525,1825 -400,1825 -275,1825 225,1850 5,1863 -1050,1875 -525,1875 -400,1875 -275,1875 -200,1875 -98,1896 2,1900 -30,1901 -1100,1925 -475,1925 225,1950 -813,1970 -1050,1975 -750,1975 -80,1998 -650,2000 -1100,2025 50,2025 -485,2040 -625,2050 -275,2050 225,2050 -420,2055 -1050,2075 -1100,2100 -650,2100 -600,2100 225,2125 -1050,2150 -725,2150 -675,2150 -625,2150 -807,2160 -1100,2200 -700,2200 -650,2200 -600,2200 -75,2200 225,2200 -32,2221 -950,2225 -858,2236 -575,2244 -984,2248 -1050,2250 -950,2275 -75,2275 -1100,2300 -900,2300 -570,2310 -1050,2350
  other v2: -1586.43,935.61 -1547.06,935.61 -1567.17,955.91 -1586.43,974.98 -1547.06,974.98
GPS_EN: Q3.1 U4.3 | length 2691.8
  Bottom Layer w8: U4.3 -787.81,2277.77 -787.81,2358.49 -764.43,2381.87 -38.87,2381.87 157,2186 157,1959 172.81,1943.19 172.81,1921.14 141,1889.33 141,1261.24 76,1196.24 76,839 27,790 27,739 8.6,720.6 Q3.1
GSM_DCD: U4.32
GSM_DTR: U4.33 U12.26 | length 870.1
  Top Layer w8: v1(-923,1281) -908,1296 v1(-782,1296)
  Bottom Layer w8: U12.26 -953.02,1311.02 v1(-923,1281) ; v1(-782,1296) -742,1336 -742,1861.06 -766.31,1885.37 U4.33
GSM_POWER: U4.27 U12.20 | length 1110.6
  Bottom Layer w8: -942.91,933.09 -931,945 -931,990 -667,1254 -667,1876.91 -650.88,1893.03 -650.88,1918.93 U4.27
GSM_PWR_EN: Q5.1 U4.39 | length 1666
  Top Layer w8: Q5.1 -1278.95,1113.95 -1279.9,1113 v1(-1281,1113) ; v1(-1069,1086) -939,1086 -913,1112 v1(-913,1136)
  Bottom Layer w8: v1(-1281,1113) -1253,1085 -1070,1085 v1(-1069,1086) ; v1(-913,1136) -909,1132 -884.33,1132 -808.19,1208.14 -808.19,1303.48 -758,1353.67 -758,1797.88 -929.88,1969.77 -929.88,2020.17 -920.17,2029.89 U4.39@-900,2029.89
GSM_RI: U4.28 U12.13 | length 1389.2
  Bottom Layer w8: U4.28 -667.88,1947.53 -658.17,1957.24 -599.98,1957.24 -591.83,1949.09 -591.83,1894.15 -612.51,1873.46 -612.51,1150 -521.56,1059.05 U12.13
GSM_RST: U4.29 U12.21 | length 1066.6
  Bottom Layer w8: U12.21 -947.92,996.08 -687.57,1256.43 U4.29
GSM_RTS: U4.25
HIGH-PASS: C39.1 IC1.3 R8.2 R37.2 R41.2 | length 331.3
  Top Layer w12: R41.2 R8.2 R37.2 -1511.22,707.22 IC1.3 -1397.72,707.22 -1361,670.5 C39.1
LED: R9.2 U4.38 | length 144.3
  Top Layer w8: v1(-812,2048) -773,2048 R9.2
  Bottom Layer w8: U4.38 -846.8,2010.2 -812,2045 v1(-812,2048)
NetC1_1: C1.1 D5.2 L1.1 U7.8 | length 185.2
  Top Layer w39.37: D5.2 -1754.04,592.02 -1754.04,447.8 U7.8
  other v1: -1799,382 -1772,384 -1799,408 -1772,408.5 -1772,433 -1799,434 -1765,666 -1739,666 -1713,666 -1778,688 -1752.5,688 -1727,688
NetC1_2: C1.2 U7.1 | length 119.1
  Top Layer w10: C1.2 -1784,247 -1773.22,236.22 U7.1
NetC6_1: C6.1 U4.7 | length 114.5
  Top Layer w8: C6.1 v1(-699,2333)
  Bottom Layer w8: U4.7 -707.26,2304.06 -699,2312.33 v1(-699,2333)
NetC22_1: C22.1 D4.2 U7.2 | length 330.8
  Top Layer w39.37: U7.2 -1685.38,160.38 -1664,139 v1@-1645,139
  Bottom Layer w39.37: C22.1 -1597.64,139.37 D4.2
  other v1: -1645,131 -1656,152 -1631,152 -1632,176 -1657,177
NetC34_1: C34.1 R96.2 | length 32.3
  Top Layer w20: R96.2 -1683.57,526.65 C34.1
NetC34_2: C34.2 C95.2 U7.6 | length 100.3
  Top Layer w8: C34.2 -1640.56,526.38 C95.2 -1635.38,478.68 U7.6
NetC62_2: C62.2 E2.1 R78.2 | length 690.7
  Bottom Layer w25.98: E2.1 -1496.38,1653 cw(c-1396.38,1653) -1396.38,1753 C62.2 R78.2
NetC86_2: C86.2 Q9.1 R82.2 U3.1 | length 469.9
  Top Layer w8: C86.2 -747.6,1154.6 Q9.1 -752.81,1121.08 -752.81,1019.81 -748,1015 R82.2 -682,984 -661.19,963.19 -661.19,935.07 -676.52,919.75 -676.52,889.48 -709,857 -709,815.12 U3.1
NetC90_2: C90.2 U7.4 | length 66
  Top Layer w8: U7.4 -1585.38,172.34 C90.2
NetD1_1: D1.1 R24.1 | length 63.1
  Top Layer w12: D1.1 -287.76,798.94 R24.1
NetD2_1: D2.1 R9.1 | length 32.2
  Top Layer w10: R9.1 -769,2116.92 D2.1
NetD9_1: D9.1 R28.2 | length 30.3
  Bottom Layer w12: R28.2 -93.82,885.02 D9.1
NetF3_1: F3.1 U3.8 | length 127.5
  Top Layer w19.68: F3.1 -1105,878 -1065.09,838.09 U3.8
NetIC1_2: IC1.2 R8.1 R38.1 R39.2 | length 323.9
  Top Layer w12: R8.1 -1476.22,757.22 IC1.2 -1387.78,757.22 -1317,828 -1317,871 R38.1
NetIC1_6: IC1.6 R27.2 R36.2 | length 339.4
  Top Layer w8: IC1.6 -1185.78,707.22 -1177,716 v1(-1177,735) ; v1(-1178,847) -1115,847 -1104,836 R36.2 -1144,775 R27.2
  Bottom Layer w8: v1(-1178,847) -1178,736 v1(-1177,735)
NetL68_1: L68.1 R77.1 | length 38
  Top Layer w8: R77.1 32,481 cw(c32,474) L68.1
NetL68_2: L68.2 P22.1 U1.11 | length 294.6
  Top Layer w26: P22.1 L68.2 95,552 cw(c181.08,552) 181.08,638.08 U1.11
NetQ1_1: Q1.1 Q2.1 R23.1 | length 215.7
  Top Layer w12: R23.1 -559,640 Q2.1 Q1.1
NetQ4_1: Q4.1 Q5.3 R49.2 | length 91.8
  Top Layer w8: R49.2 -1354,1067.29 Q5.3 -1362.8,1077 Q4.1
NetR11_2: R11.2 U4.44 | length 57.4
  Top Layer w8: v1(-857.31,2128.31) -857,2128 R11.2
  Bottom Layer w8: U4.44 v1(-857.31,2128.31)
NetR19_1: R19.1 R21.2 U7.5 | length 128.3
  Top Layer w8: R21.2 -1606.05,482.05 -1585.38,461.38 U7.5 -1534.52,429.13 R19.1
NetR28_1: R28.1 U1.4 | length 81.9
  Top Layer w12: U1.4 -120.31,811.31 v1(-119,810)
  Bottom Layer w12: v1(-119,810) -116.12,812.88 R28.1
NetR43_1: R43.1 U10.12 | length 117.3
  Top Layer w8: U10.12 -1501.58,990.94 R43.1
NetR44_1: R44.1 U10.14 | length 86.4
  Top Layer w8: R44.1 -1591.75,1070.78 -1556.9,1035.93 U10.14
NetR45_1: R45.1 U10.16 | length 83.8
  Top Layer w8: R45.1 -1625.97,1063.97 -1596.27,1034.27 U10.16
NetR77_2: R77.2 U1.14 | length 397.1
  Top Layer w8: R77.2 5,668 cw(c105,668) 105,768 U1.14
NetR83_1: R83.1 U3.2 | length 51.9
  Top Layer w8: U3.2 R83.1@-765.09,860.91
NetR88_1: R88.1 U10.1 | length 114.8
  Top Layer w8: R88.1 -1659.06,1070.06 -1625.8,1036.8 U10.1
OSC1: C8.2 U4.5 Y1.3 | length 312.4
  Top Layer w8: Y1.3 -830.74,2182.26 -796,2217 -796,2265.94 -782.94,2279 C8.2 -765,2325 v1(-748,2342)
  Bottom Layer w8: v1(-748,2342) -750.81,2339.19 -750.81,2308.14 -746.63,2303.96 U4.5
OSC2: C15.1 U4.6 Y1.1 | length 376.7
  Top Layer w8: Y1.1 -916.75,2379.3 -751.63,2379.3 -724.19,2351.86 -724.19,2320.81 v1(-727,2318) -732,2313 C15.1
  Bottom Layer w8: U4.6 v1@-726.95,2316.66
OUTPUT1: U3.7 U4.45 | length 1621.7
  Top Layer w8: v1(-1037,860) -1036,860 -1015.09,839.09 U3.7
  Bottom Layer w8: v1(-1037,860) -1029,868 -1029,1522.26 -1018.26,1533 -912,1533 -841,1604 -841,1761.7 -833.19,1769.51 -833.19,1805.19 -977.88,1949.88 -977.88,2118.79 -948.68,2148 U4.45
OUTPUT2: U3.6 U4.46 | length 1717.2
  Top Layer w8: v1(-1054,888) -989,888 -965.09,864.09 U3.6
  Bottom Layer w8: v1(-1054,888) -1045,897 -1045,1569.25 -1021.55,1592.7 -912.93,1592.7 -857,1648.63 -857,1768.33 -849.19,1776.14 -849.19,1798.56 -993.88,1943.26 -993.88,2125.42 -951.18,2168.12 -894.7,2168.12 U4.46
PEAK: C36.1 C37.1 D1.2 R25.1 | length 150.3
  Top Layer w10: C37.1 -479.18,826.89 R25.1 -478.57,797.24 -422.76,797.24 D1.2
PW_ON: C68.1 Q8.3 Q9.3 R3.1 R4.2 R68.1 U7.3 | length 1752.4
  Top Layer w8: -1507,307 -1485,329 v1(-1485,585) ; v1(-1072,1002) -1007,1002 -988,983 -918,983 R4.2 -917,1033.71 Q8.3 -913,1042 -897.19,1057.81 -785,1057.81 Q9.3 R3.1 ; R4.2@-917,981 R68.1@-849,981
  Top Layer w12: U7.3 -1635.38,291.62 -1620,307 -1507,307
  Bottom Layer w8: v1(-1485,585) -1500.8,585 -1524.4,608.6 -1524.4,798.6 -1455,868 -1394.67,868 -1274.67,988 -1086,988 v1(-1072,1002)
PWR_EN: Q8.1 R93.1 U4.2 | length 1553.2
  Top Layer w8: v1(-890,1196) R93.1 -875.6,1157.6 Q8.1 ; v1(-873,1786) -846,1786 -816,1756 -816,1753 v1(-817,1752)
  Bottom Layer w8: v1(-890,1196) -871.81,1214.19 -871.81,1313.74 -813,1372.56 -813,1752 v1(-817,1752) ; -872,1798.75 -1009.88,1936.63 -1009.88,2288.12 -967,2331 -825.68,2331 -805.68,2311 U4.2
RFID_ANT1: P4.7 Q1.2 Q2.2 | length 193.6
  Top Layer w12: Q2.2 v1(-453,564) Q1.2
  Bottom Layer w12: P4.7 -495.92,576.92 -483,564 v1(-453,564)
RFID_ANT2: C35.2 P4.8 R24.2 | length 355.7
  Top Layer w12: C35.2 -338.57,755.81 R24.2 -258,727.18 v1(-258,708)
  Bottom Layer w12: P4.8 -301.72,582.28 -258,626 v1(-258,708)
RFID_CLK: U3.5 U4.11 | length 3270.4
  Top Layer w8: U3.5 -915.09,772.09 -908.53,765.53 -800.28,765.53 -793.25,772.56 -793.25,882.25 -808.81,897.81 -808.81,1016.81 v1(-826,1034) ; v1(-728,1085) -687,1085 -668.19,1103.81 -42.14,1103.81 -39.33,1101 v1(28,1101)
  Bottom Layer w8: v1(-826,1034) -826,1035 -776,1085 v1(-728,1085) ; U4.11 -628.51,2304.38 -599.02,2333.87 -58.76,2333.87 109,2166.12 109,1274.49 28,1193.49 v1(28,1101)
RFID_DEMOD: U3.13 U4.10 | length 3345.6
  Top Layer w8: U3.13 -865.09,658.91 -850,674 -703.49,674 -692.27,662.78 -671,662.78 -651.74,643.52 v1(-598.81,643.52)
  Bottom Layer w8: U4.10 -648.2,2304.38 -644.51,2308.07 -644.51,2311.01 -605.65,2349.87 -52.13,2349.87 125,2172.75 125,1267.86 60,1202.86 60,845.63 11,796.63 11,773.33 -15.52,746.81 -444.19,746.81 -547.48,643.52 v1(-598.81,643.52)
RFID_GND: C35.1 C36.2 C38.1 D3.2 D6.1 Q2.3 R25.2 R26.2 R27.1 R37.1 R38.2 R40.1 U3.14 | length 2362.5
  Top Layer w12: Q2.3 -329.2,602 -317,614.2 -317,635 v1(-311,641) ; C35.1@-404.18,754.78 -398,748.6 v1(-398,723)
  Top Layer w20: v1(-1551,728) -1551,678 -1547,674 R37.1 -1513.28,667.28 -1513.28,643.28 -1496.72,626.72 -1483.72,626.72 -1418,561 -1310.54,561 -1295.54,576 -1104.41,576 -1104,576.41 ; v1(-1414,892) -1413,892 -1392,913 R40.1 R38.2 ; R27.1 R26.2 C38.1 -1104,576.41 ; D3.2 D6.1 C35.1@-404.18,754.78 ; Q2.3 -548,602 -595.2,554.8 -803.71,554.8 -815.09,566.19 -826.48,554.8 -1082.39,554.8 -1104,576.41
  Bottom Layer w12: v1(-398,723) -335,723 -311,699 v1(-311,641)
  Bottom Layer w20: v1(-1551,728) -1551,803.11 -1462.11,892 v1(-1414,892)
SCL: R6.1 U4.42 U5.6 | length 1022
  Top Layer w8: v1(-954.07,2077.38) -965,2066.45 -965,1945 -908,1888 -583,1888 -443,2028 v1(-314,2028)
  Bottom Layer w8: v1(-954.07,2077.38) -942.51,2088.94 U4.42 ; v1(-314,2028) -306.36,2020.36 U5.6 -238.64,2020.36 R6.1
SD_MISO: U4.16 U13.2 | length 394
  Bottom Layer w8: U4.16 -343,2148 -267.69,2223.31 U13.2@-177.13,2223.31
SD_MOSI: U4.17 U13.5 | length 97.5
  Bottom Layer w8: U4.17 -449.96,2128.31 U13.5
SD_SCK: U4.15 U13.6 | length 97.5
  Bottom Layer w8: U4.15 -449.97,2167.68 U13.6
SDA: R7.1 U4.43 U5.7 | length 1081.3
  Top Layer w8: v1(-944,2116) -949.12,2116 -981,2084.12 -981,1938.37 -914.63,1872 -576.37,1872 -452.37,1996 -327,1996 v1(-325,1998)
  Bottom Layer w8: v1(-944,2116) -936.63,2108.63 U4.43 ; v1(-325,1998) -322.32,2000.68 U5.7 -238.68,2000.68 R7.1
SENS_BAT: R58.2 R74.1 U4.18 | length 3655.2
  Top Layer w8: v1(-1065,689) -1053.67,689 -1033.86,708.81 -1014.14,708.81 -1011.33,706 -690.24,706 -679.01,694.78 -632.78,694.78 v1(-624,686)
  Top Layer w12: R74.1 -1667.56,846.56 -1483.44,846.56 -1473.17,856.83 R58.2 -1427.83,856.83 v1(-1411,840)
  Bottom Layer w8: v1(-1411,840) -1411,779 -1316,684 -1070,684 v1(-1065,689) ; v1(-624,686) -527.63,686 -450.82,762.81 -93.19,762.81 -58.93,797.07 -58.93,898.07 -36,921 -36,1212 50,1298 50,1936 -104,2090 -252.16,2090 -268.11,2105.95 -350.64,2105.95 -357.59,2099 -498.65,2099 -505.87,2106.22 -505.87,2106.87 -507.63,2108.63 U4.18
SENS_VIN: C68.2 R67.2 R68.2 U4.19 | length 2582.5
  Top Layer w8: C68.2 -883,939 R68.2@-849,939 ; R68.2 R68.2@-849,939 ; v1(-837,868) -850,881 R67.2 -849,909 R68.2@-849,939 ; v1(-729,1053) -693,1053 -667,1079 v1(-61,1079)
  Bottom Layer w8: v1(-837,868) -833.5,871.5 -833.5,985.5 -766,1053 v1(-729,1053) ; U4.19 -511.22,2088.94 -505.28,2083 -350.96,2083 -344.01,2089.95 -279.95,2089.95 -260.32,2070.32 -106.94,2070.32 34,1929.37 34,1304.63 -52,1218.63 -52,1088 v1(-61,1079)
SIM_CLK: C58.2 P10.3 U12.29 | length 873.2
  Top Layer w8: v1@-862,1544.47 -378.47,1544.47 -343.45,1509.45 P10.3 -141.76,1509.45 C58.2
  Bottom Layer w8: U12.29 -906.01,1499.99 v1(-862,1544)
SIM_DATA: C59.2 P10.7 U12.30 | length 890.3
  Top Layer w8: v1(-928,1563) -873.85,1508.85 P10.7 -396.85,1508.85 -330,1442 C59.2
  Bottom Layer w8: U12.30 v1(-928,1563)
SIM_RST: C57.2 P10.2 U12.27 | length 1013.1
  Top Layer w8: v1(-837,1569) -828.47,1560.47 -383.53,1560.47 -332,1612 P10.2 -241.93,1613.63 C57.2
  Bottom Layer w8: U12.27 -918.18,1374.01 -837,1455.19 v1(-837,1569)
SIM_VDD: C56.1 P10.1 U12.31 | length 877.1
  Top Layer w12: v3(-933,1627) -692.41,1627 -669.58,1649.83 -386.17,1649.83 -320.85,1715.15 P10.1 -243.41,1715 C56.1
  Bottom Layer w12: U12.31 -934.02,1625.98 v3(-933,1627)
SWCLK: P2.2 U4.34 | length 171.8
  Bottom Layer w8: U4.34 -785.99,2000.01 -756,2030 P2.2
SWDIO: P2.3 U4.37 | length 226.3
  Bottom Layer w8: U4.37 -834.48,1990.52 -745,2080 P2.3
UART1_RX: U4.31 U12.23 | length 981.6
  Bottom Layer w8: U12.23@-982,1122.06 U12.23 ; U12.23 -971.11,1112 -877.25,1112 -726,1263.25 -726,1920.68 U4.31
UART1_TX: U4.30 U12.22 | length 1019.1
  Bottom Layer w8: U12.22 -907.56,1059.07 -707.25,1259.37 U4.30
UART2_RX: U1.2 U4.13 | length 2272.9
  Top Layer w8: U1.2 v1(7.92,897.92)
  Bottom Layer w8: U4.13 -540.81,2207.93 -540.81,2290 -515.81,2315 -62.51,2315 92,2160.49 92,1280.12 4.19,1192.31 4.19,901.65 v1(7.92,897.92)
VBAT: C25.2 P13.2 R74.2 U10.2 U10.3 | length 52.3
  Top Layer w12: R74.2 -1678.24,902.76 C25.2
VGPS: C40.2 Q3.3 U1.7 U1.8 | length 373
  Top Layer w12: U1.7 U1.8 -116.08,638.08 v1(-115,637)
  Bottom Layer w12: v1(-115,637) -114,638 C40.2 14,638 64.29,688.29 Q3.3
VGSM: C32.1 C48.1 C49.1 C51.2 C53.1 Q4.3 U12.1 U12.2 | length 1602.1
  Top Layer w78.74: Q4.3 -1221.42,1094.89 -1214.95,1101.35 -1203.82,1101.35 -949.17,1356 -555,1356 -548,1363 v1@-548,1388
  Bottom Layer w78.74: v1@-548,1388 -548,1558 -344.4,1761.6 C48.1
  other v1: -576,1388 -548.5,1388 -521,1388 -577,1413 -549,1413 -521,1413
VIN: D4.1 P4.1 R67.1 U3.9 | length 1087.9
  Top Layer w8: U3.9 -1065.09,643.91 v1(-1024,685) ; R67.1 -892,882 -891,883 v1(-891,886)
  Top Layer w10: U3.9 -1065.09,585 v1(-1046,585)
  Bottom Layer w8: v1(-1024,685) -1001.5,707.5 -917,707.5 -891,733.5 v1(-891,886)
  Bottom Layer w10: P4.1 -1049.28,582.28 -1046.57,585 v1(-1046,585)
  Bottom Layer w39.37: D4.1 -1429.52,371.48 -1349,452 -1349,517.94 -1284.65,582.28 P4.1
pads on no net: E2.2 E2.3 E2.4 E2.5 P10.6 U1.3 U1.5 U1.9 U1.13 U1.15 U1.16 U1.17 U1.18 U4.12 U5.2 U5.10 U5.11 U5.12 U10.7 U10.9 U11.4 U12.5 U12.6 U12.7 U12.8 U12.9 U12.11 U12.14 U12.15 U12.16 U12.17 U12.18 U12.19 U12.24 U12.25

## Polygon pours and split planes (outlines as drawn)
GND on Top Layer "Top Layer-GND" (solid, remove dead copper, pour order 3): -1822.48,-295.16 -1819,1197 -1214,1197 -1128,1283 -1128,2394.95 100.12,2395.84 100.12,2395.76 ccw(c179.94,2341.98) 249.74,2275.72 250,2275.48 249,1466 243.87,1466.01 246,964 250,-295.16 -48,-295.16 -48,532 -1293,532 -1293,-295.16
GND on Bottom Layer "Bottom Layer-GND" (solid, remove dead copper, pour order 4): -1822.48,-295.16 -1819,1197 -1234,1197 -1128,1303 -1128,2394.95 100.12,2395.84 100.12,2395.76 ccw(c179.94,2341.98) 249.74,2275.72 250,2275.48 249,1466 243.87,1466.01 246,964 250,-295.16 -48,-295.16 -48,532 -1293,532 -1293,-295.16

## Keep-outs
Keep-Out Layer:
  lines w3.94: -1822.48,2246 -1822.48,-295.16 -1293,-295.16 -1293,532 -48,532 -48,-295.16 250,-295.16 250,2275.48 ; -1822.4,2246 ccw(c-1768.63,2325.82) -1702.36,2395.62 ; -1702.36,2395.84 100.12,2395.84 ; 100.12,2395.76 ccw(c179.94,2341.98) 249.74,2275.72

## Other copper
Top Layer:
  rectangle net VGSM: -588,1375 -509,1425
  region net NetC22_1: -1670,270 -1670,215 -1645,190 -1625,190 -1618,183 -1618,131 -1630,119 -1684,119 -1700,135 -1700,270
  region net VBAT: -1610,970 -1610,940 -1780,940 -1800,960 -1800,990 -1780,1010 -1756,1010 -1716,970
  region net 4V4: -1525,970 -1435,970 -1390,1015 -1286,1015 -1286,988 -1373,988 -1421,940 -1525,940
  region net NetC1_1: -1724,380 -1740,364 -1796,364 -1811,379 -1811,443 -1786,468 -1734,468 -1724,458
  region net 5V: -1542,999 -1542,1038 -1565,1061 -1565,1110 -1525,1110 -1525,1006 -1532,999
  region net NetC1_1: -1700,565 -1700,700 -1785,700 -1790,695 -1790,565
Bottom Layer:
  rectangle net VGSM: -588,1375 -509,1425
  region net VGSM: -5,1720 -5,1835 -215,1835 -215,1721 -214,1720
  region net NetC22_1: -1499,246 -1499,150 -1559,90 -1745,90 -1745,190 -1626,190 -1570,246
  region net NetC1_1: -1783,594 -1784,593 -1784,469 -1811,442 -1811,379 -1798,366 -1769,366 -1761,374 -1761,424 -1741,444 -1718,444 -1715,447 -1715,587 -1720,592
  region net NetC1_1: -1716.5,445.5 -1716.5,633.5 -1700,650 -1700,700 -1785,700 -1790,695 -1790,565 -1785,560 -1785,445

## Silkscreen, mask and mechanical layers (free items; w line width, h text height)
Top Overlay:
  lines w3.94: -609.98,1746.85 -609.98,1883.26 ; -606.05,1237.59 -606.05,1474.99
Bottom Overlay:
  text "MCU" at -762,2163 h25
  text "GSM ANT" at -1255.65,1819.16 h25 r90
  text "GPS" at 54.1,344.97 h25
Mechanical 15:
  lines w7.87: -1620.61,93.71 -77.31,93.71 -77.31,2219.69 -1620.61,2219.69 -1620.61,93.71

## Text inside footprints (layer, text, board x,y; h text height)
L1: Bottom Overlay "5.6uH" at -1635,707 h25